# Altium PCB PCB1.PcbDoc
Units mil, origin at the board's own origin, x right, y up, seen from the top; angles counter-clockwise.
Board outline 2135 x 2975 mil, 2 copper layers (POWER/SIGNAL, GROUND); 15 components, 13 nets, 53 pads, 0 vias.
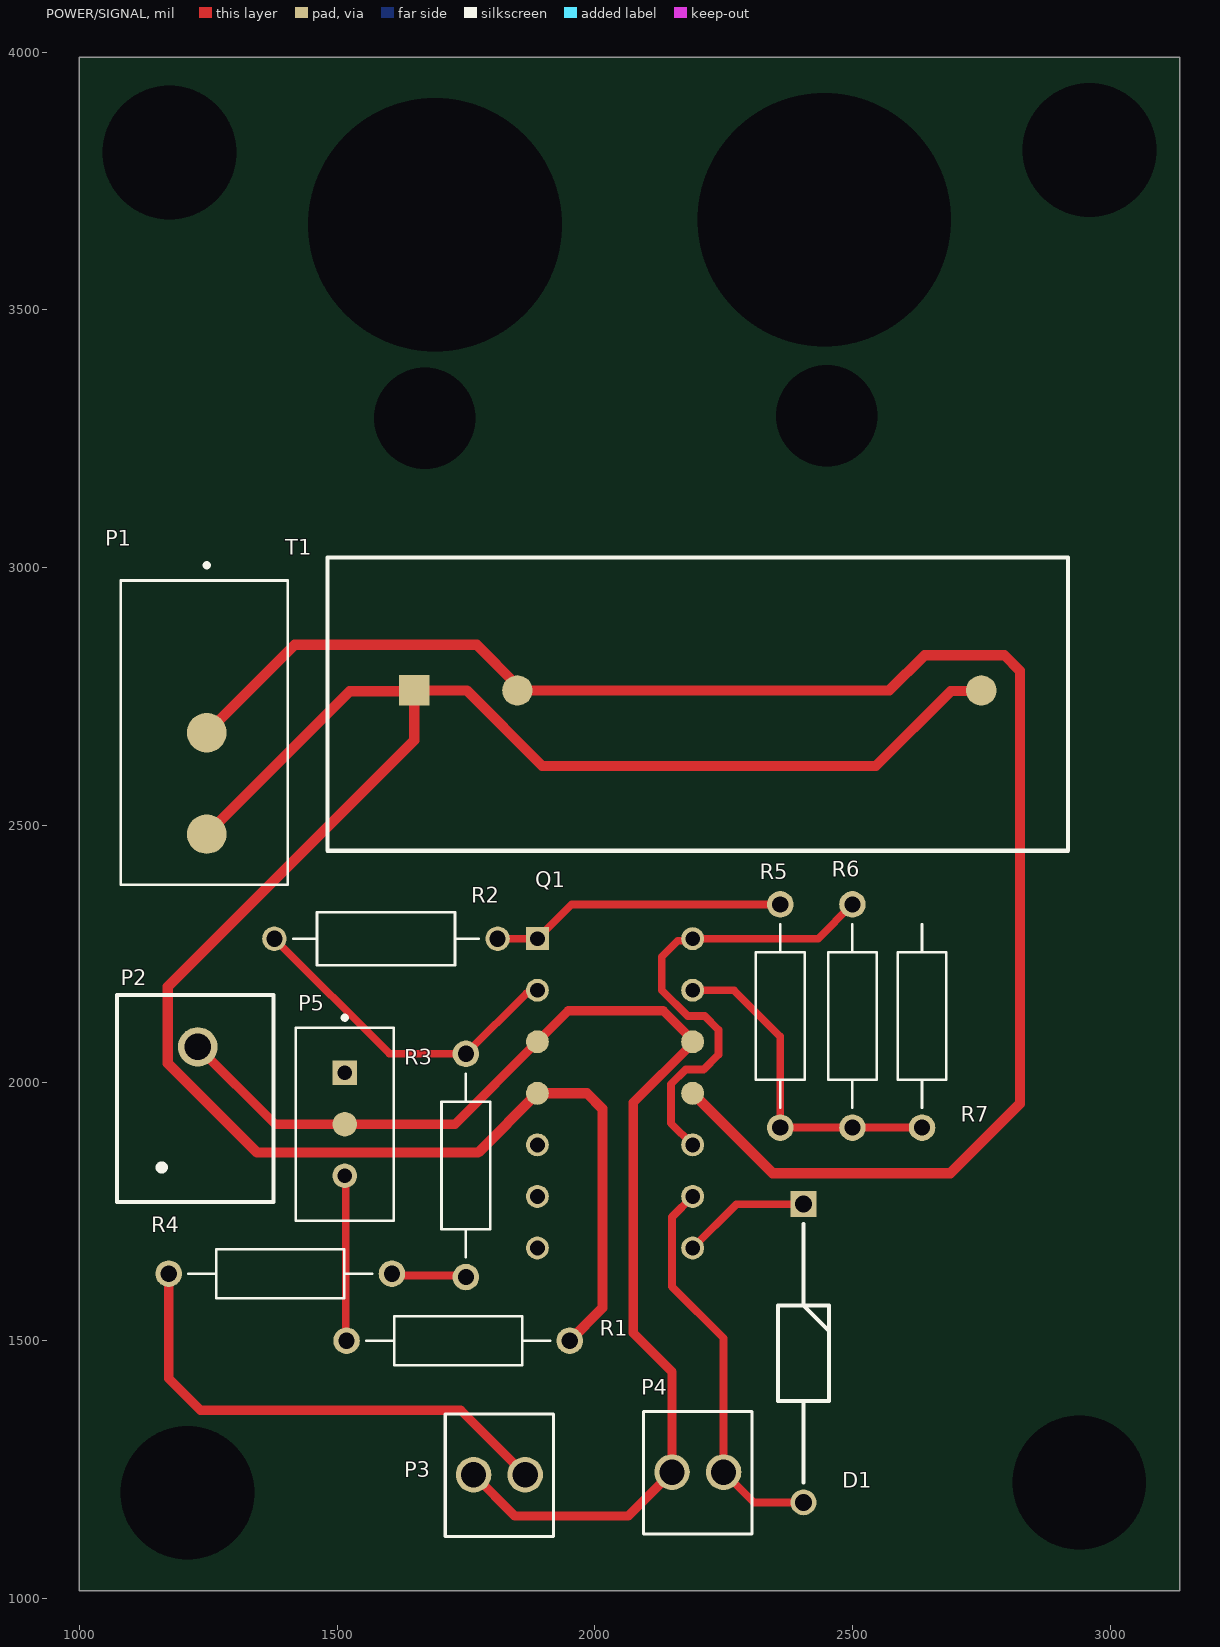
[diagram p0: POWER/SIGNAL view]
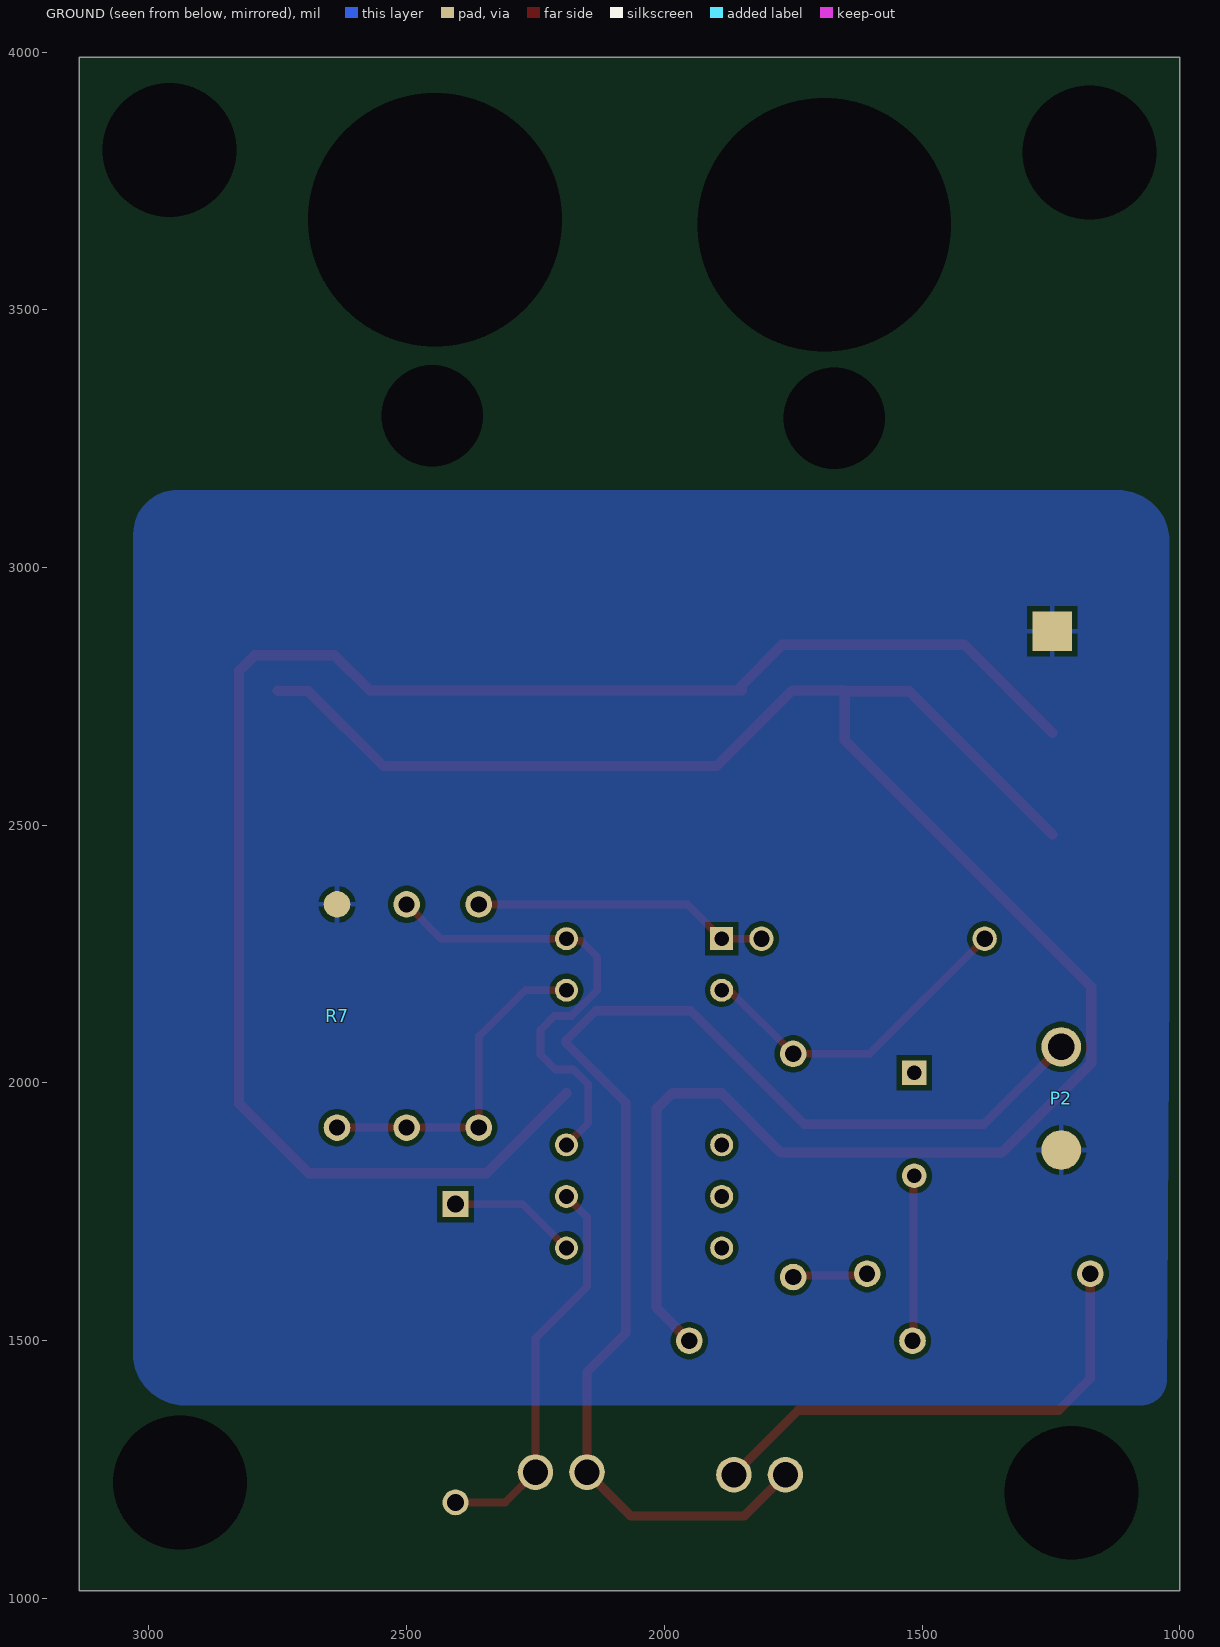
[diagram p1: GROUND view, seen from below]
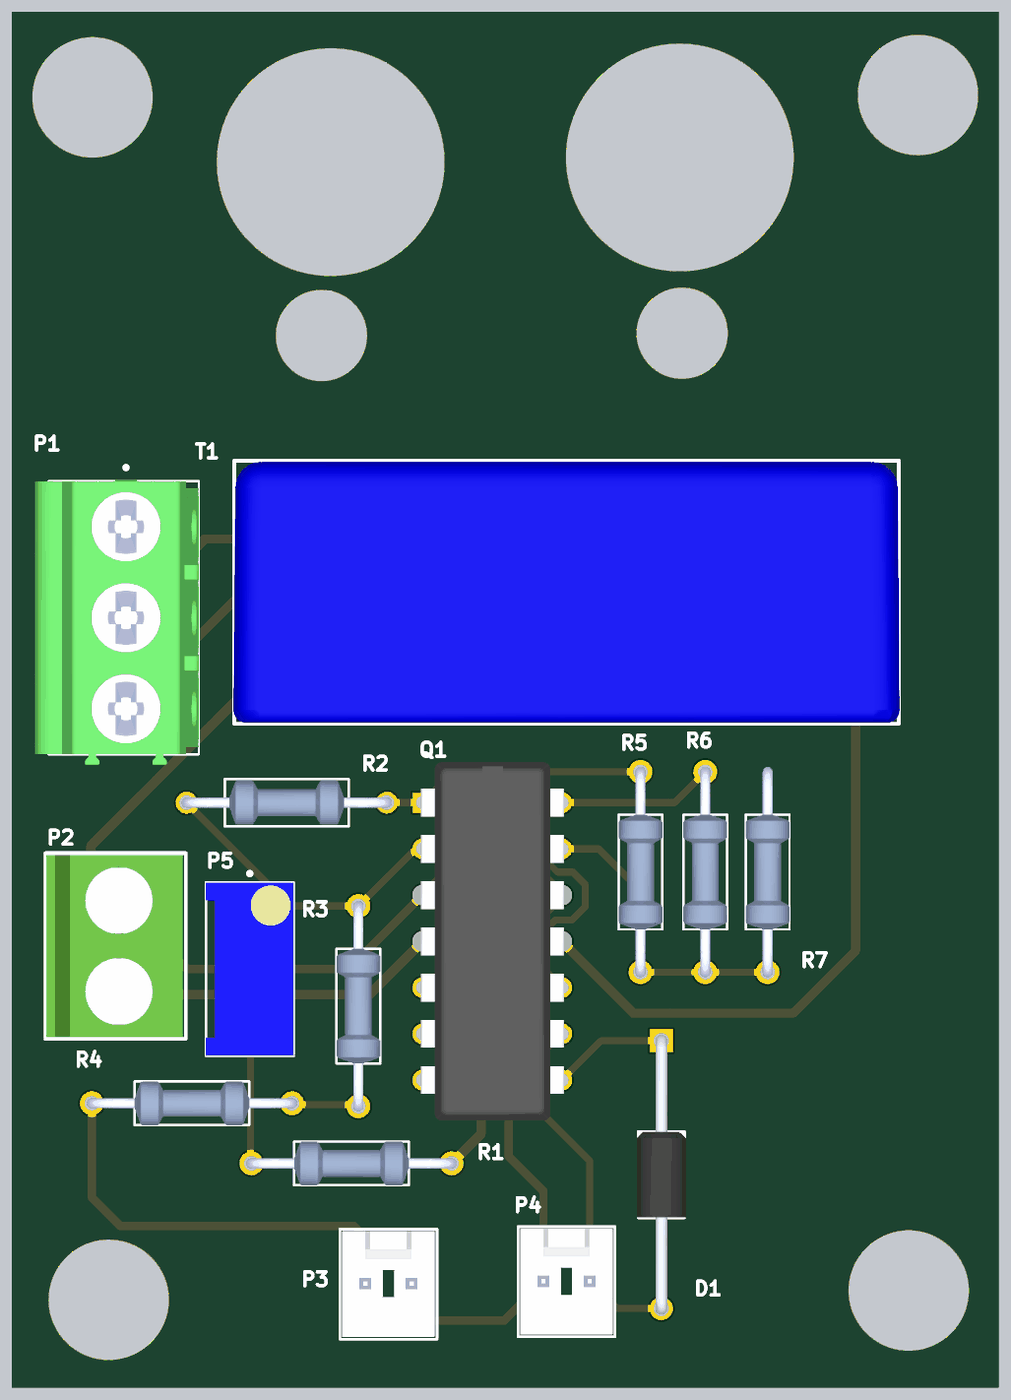
[diagram p2: 3D render of the assembled board from above, using the file's embedded part models]

## Layer stack, top to bottom
Top Solder: solder mask 0.4, Solder Resist, Dk 3.5
POWER/SIGNAL: signal copper 1.4
Dielectric 1: dielectric 12.6, FR-4, Dk 4.8
GROUND: signal copper 1.4
Bottom Solder: solder mask 0.4, Solder Resist, Dk 3.5

## Board outline
1000,1015 3135,1015 3135,3990 1000,3990

## Design rules (kind name [scope] priority, off if disabled: settings)
Clearance [All] p1: gap=10 ignorepadtopadclearanceinfootprint=FALSE
Height [All] p1: minheight=0 maxheight=1100 prefheight=500
HoleSize [All] p1: absolutevalues=TRUE maxlimit=500 minlimit=1 maxpercent=80.000 minpercent=20.000
PolygonConnect [All] p1: connectstyle=Relief reliefconductorwidth=10 reliefentries=4 polygonreliefangle="90 Angle" airgapwidth=10
RoutingVias [All] p1: holewidth=28 width=50 viastyle="Through Hole" minholewidth=28 minwidth=50 maxholewidth=28 maxwidth=50
SilkToSolderMaskClearance [IsPad] p1: minsilkscreentomaskgap=9 clearancetoexposedcopper=TRUE
SolderMaskExpansion [All] p1: expansion=4 istentingtop=FALSE
SupplyNets "Schematic Supply Nets_3" [InNet('+15')] p1: voltage=0.000
SupplyNets "Schematic Supply Nets_2" [InNet('GND')] p2: voltage=0.000
SupplyNets "Schematic Supply Nets_1" [InNet('-15')] p3: voltage=0.000
SupplyNets "Schematic Supply Nets" [InNet('+5')] p4: voltage=0.000
Width [All] p1: maxlimit=20 minlimit=10 preferedwidth=10 bottomlayer_maxwidth=10 minimp=50.000000 maximp=50.000000 favimp=50.000000
27 further rules are at their usual default settings.

## Components (designator, comment, footprint, x,y, rotation, side; value= is the part's Value field where it differs from the comment)
D1 "DIODE" Diode 2395,1470 r270 top
P1 "3 PIN JACK" "3 PIN JACK" 1235,2680 r270 top
P2 "2 PIN JACK" "2 PIN JACK" 1230,1975 r90 top
P3 "2 Pin" "2 PIN" 1815,1245 r0 top
P4 "2 Pin" "2 PIN" 2200,1250 r0 top
P5 "Potentiometer" Potentiometer 1515,1920 r270 top
Q1 "TL084CN" TL084CN 2040,2005 r0 top
R1 "47" 47 1720,1500 r0 top
R2 "3.48K" 3.48K 1590,2295 r180 top
R3 "0.97K" 0.97K 1745,1860 r90 top
R4 "8.97K" 8.97K 1390,1635 r180 top
R5 "7.9K" 7.90K#1 2365,2125 r270 top
R6 "9.94K" 9.94K 2500,2120 r270 top
R7 "7.9K" 7.90K#2 2640,2125 r270 top
T1 "Transducer" Transducer 2155,2685 r0 top

## Footprints (in the part's own frame and the unit in brackets; to place one, negate y for a bottom-side part, rotate by r counter-clockwise, add the part's x,y. Pads: shape width x height; smd on the part's side, far side on the other; paste and mask are expansions set on the pad)
0.97K [mil]
  round 51.5 hole 31.5: 1(-236.54,-5) 2(196.54,-5)
  silkscreen extent -198,-52 158,42, body extent -247,-52 207,42, height 94
"2 PIN" [mil]
  round 69 hole 49 mask+4.02: 1(50,-5) 2(-50,-5)
  silkscreen extent -105,-125 105,113, body extent -100,-120 100,108, height 461
"2 PIN JACK" [mm]
  round 1.95 smd far side: 1(-2.667,0)
  round 1.95 hole 1.3: 2(2.413,0)
  silkscreen extent -5.23,-3.72 4.97,3.98, body extent -5.13,-3.56 4.87,3.94, height 11.5
"3 PIN JACK" [mm]
  rect 1.95x1.95 smd far side: 1(-4.993,0.313)
  round 1.95 smd: 2(0.007,0.313) 3(5.007,0.313)
  silkscreen extent -8.34,-3.94 7.51,4.31, body extent -7.59,-4.69 8.08,4.31, height 11.55
3.48K [mm]
  round 1.2 hole 0.8: 1(-5.627,0.381) 2(5.373,0.381)
  silkscreen extent -4.71,-0.92 4.45,1.68, body extent -5.9,-0.82 5.65,1.58, height 2.4
7.90K#1 [mil]
  round 51.5 hole 31.5: 1(-221.54,-5) 2(211.54,-5)
  silkscreen extent -183,-52 173,42, body extent -232,-52 222,42, height 94
7.90K#2 [mil]
  round 51.5 smd far side: 1(-221.54,-5)
  round 51.5 hole 31.5: 2(211.54,-5)
  silkscreen extent -183,-52 173,42, body extent -232,-52 222,42, height 94
8.97K [mm]
  round 1.308 hole 0.8: 1(-5.5,0.127) 2(5.5,0.127)
  silkscreen extent -4.53,-1.07 4.53,1.33, body extent -5.77,-1.07 5.77,1.33, height 2.4
9.94K [mm]
  round 1.308 hole 0.8: 1(-5.754,0) 2(5.246,0)
  silkscreen extent -4.78,-1.2 4.27,1.2, body extent -6.03,-1.2 5.52,1.2, height 2.4
47 [mm]
  round 1.308 hole 0.8: 1(-5.119,0) 2(5.881,0)
  silkscreen extent -4.15,-1.2 4.91,1.2, body extent -5.39,-1.2 6.16,1.2, height 2.4
Diode [mm]
  rect 1.275x1.275 / inner round 1.275 / far side rect 1.275x1.275 hole 0.85: 1(-7.493,0.254)
  round 1.275 hole 0.85: 2(7.207,0.254)
  silkscreen extent -6.51,-1 6.22,1.5, body extent -7.82,-1.09 7.53,1.59, height 2.7
Potentiometer [mm]
  rect 1.218x1.218 / inner round 1.218 / far side rect 1.218x1.218 hole 0.71: 1(-2.54,0)
  round 1.218 smd: 2(0,0)
  round 1.218 hole 0.71: 3(2.54,0)
  silkscreen extent -5.35,-2.41 4.76,2.42, body extent -4.76,-2.41 4.76,2.42, height 11.55
TL084CN [mm]
  rect 1.13x1.13 / inner round 1.13 / far side rect 1.13x1.13 hole 0.73: 1(-3.843,6.985)
  round 1.13 hole 0.73: 2(-3.843,4.445) 5(-3.843,-3.175) 6(-3.843,-5.715) 7(-3.843,-8.255) 8(3.81,-8.255) 9(3.81,-5.715) 10(3.81,-3.175) 13(3.81,4.445) 14(3.81,6.985)
  round 1.13 smd: 3(-3.843,1.905) 4(-3.843,-0.635) 11(3.81,-0.635) 12(3.81,1.905)
  body extent -3.94,-10.48 3.94,9.21, height 5.82
Transducer [mm]
  rect 1.5x1.5 smd: 1(-12.827,1.945)
  round 1.5 smd: 2(-7.747,1.945) 3(15.113,1.945)
  silkscreen extent -17.11,-5.95 19.39,8.49, body extent -17.16,-5.91 19.44,8.44, height 27.2

## Part data
D1: "1N4007S"
P3 P4: "22272021"
R1: "MFR-25FRF52-47R"
R2: "MFR-25FBF52-3K48"
R3: "MFR-25FRF52-976R"
R4: "MFR-25FBF52-8K87"
R5 R7: "MFR-25FBF52-7K87"
R6: "MFR-25FTE52-9K76"
T1: "LA55-P"

## Free pads (board coordinates)
  round 60 hole 492.13: 1(1690,3665) 2(2445,3675)
  round 60 hole 259.84: 3(1175,3805) 3(1210,1205) 3(2940,1225) 3(2960,3810)
  round 60 hole 196.85: 4(1670,3290) 4(2450,3295)

## Nets (pads, with @x,y where several pads share a name; then routed paths per layer and width w, separated by ;. In a path a pad name is that pad's centre, name@x,y a point inside that pad or via, vN(x,y) a via of type N, cw(c..) or ccw(c..) an arc to the next point about the centre after c; other vN are vias at no path point)
+5: P2.2 P3.2 P4.2 P5.2 Q1.3 Q1.12 | length 2506.8
  POWER/SIGNAL w18: P2.2 1380,1920 P5.2 1728.7,1920 Q1.3 1948.7,2140 2132.78,2140 2190,2082.78 2190,2077.22 2075,1962.22 2075,1515 2150,1440 P4.2 2065,1160 1845,1160 P3.2
+15: P1.3 Q1.4 R1.2 T1.1 T1.3 | length 4112.4
  POWER/SIGNAL w20: P1.3 1524.45,2760 1648.43,2760 T1.1 ; R1.2 2015,1563.46 2015,1950 1985,1980 Q1.4 1773.7,1865 1345,1865 1171.61,2038.39 1171.61,2186.61 1650,2665 T1.1 ; T1.3 2748.9,2760.47 2690.47,2760.47 2545,2615 1898.05,2615 1751.48,2761.57 T1.1
-15: P1.2 Q1.11 T1.2 | length 3326.4
  POWER/SIGNAL w20: P1.2 1417.6,2850 1771.21,2850 1850,2771.21 T1.2 2571.57,2761.57 2640,2830 2795,2830 2825,2800 2825,1960 2690,1825 2345,1825 Q1.11
GND: P1.1 P2.1 R7.1
NetD1_1: D1.1 Q1.8 | length 250.2
  POWER/SIGNAL w15: Q1.8 2275,1765 D1.1
NetD1_2: D1.2 P4.1 Q1.9 | length 772.3
  POWER/SIGNAL w15: Q1.9 2150,1740 2150,1605 2250,1505 P4.1 2308.74,1186.26 D1.2
NetP3_1: P3.1 R4.2 | length 972.3
  POWER/SIGNAL w18: R4.2 1173.46,1426.54 1235,1365 1740,1365 P3.1
NetP5_3: P5.3 R1.1 | length 321.4
  POWER/SIGNAL w15: P5.3 1516.73,1818.27 1516.73,1501.73 R1.1
NetQ1_1: Q1.1 R2.1 R5.1 | length 576
  POWER/SIGNAL w15: R2.1 Q1.1 1955.24,2346.54 R5.1
NetQ1_2: Q1.2 R2.2 R3.2 | length 653.9
  POWER/SIGNAL w15: R2.2 1601.93,2056.54 R3.2 1867.82,2174.36 1883.06,2174.36 Q1.2
NetQ1_10: Q1.10 Q1.14 R6.1 | length 918
  POWER/SIGNAL w15: Q1.10 2147.76,1922.24 2147.76,1997.5 2176.51,2026.25 2211.25,2026.25 2240,2055 2240,2103.28 2213.28,2130 2180.26,2130 2130,2180.26 2130,2245 2160.86,2275.86 2185.86,2275.86 Q1.14 2433.46,2280 R6.1
NetQ1_13: Q1.13 R5.2 R6.2 R7.2 | length 658.8
  POWER/SIGNAL w15: Q1.13 2270,2180 2360,2090 R5.2 R6.2 R7.2
NetR3_1: R3.1 R4.1 | length 146.2
  POWER/SIGNAL w15: R4.1 1609.8,1626.73 1746.73,1626.73 R3.1
pads on no net: P5.1 Q1.5 Q1.6 Q1.7

## Polygon pours and split planes (outlines as drawn)
GND on GROUND "GND_L02_P000" (solid, pour order 0): 1020,2205 1020,3050 cw(c1120,3050) 1120,3150 2945,3150 cw(c2945,3065) 3030,3065 3030,1475 cw(c2930,1475) 2930,1375 1075,1375 cw(c1075,1425) 1025,1425 1020,2195